# Altium PCB PCB5.PcbDoc
Units mm, origin at the board's own origin, x right, y up, seen from the top; angles counter-clockwise.
Board outline 35 x 45 mm, 2 copper layers (Top Layer, Bottom Layer); 15 components, 20 nets, 70 pads, 34 vias.
Unrouted connection lines stored in the file: 2.
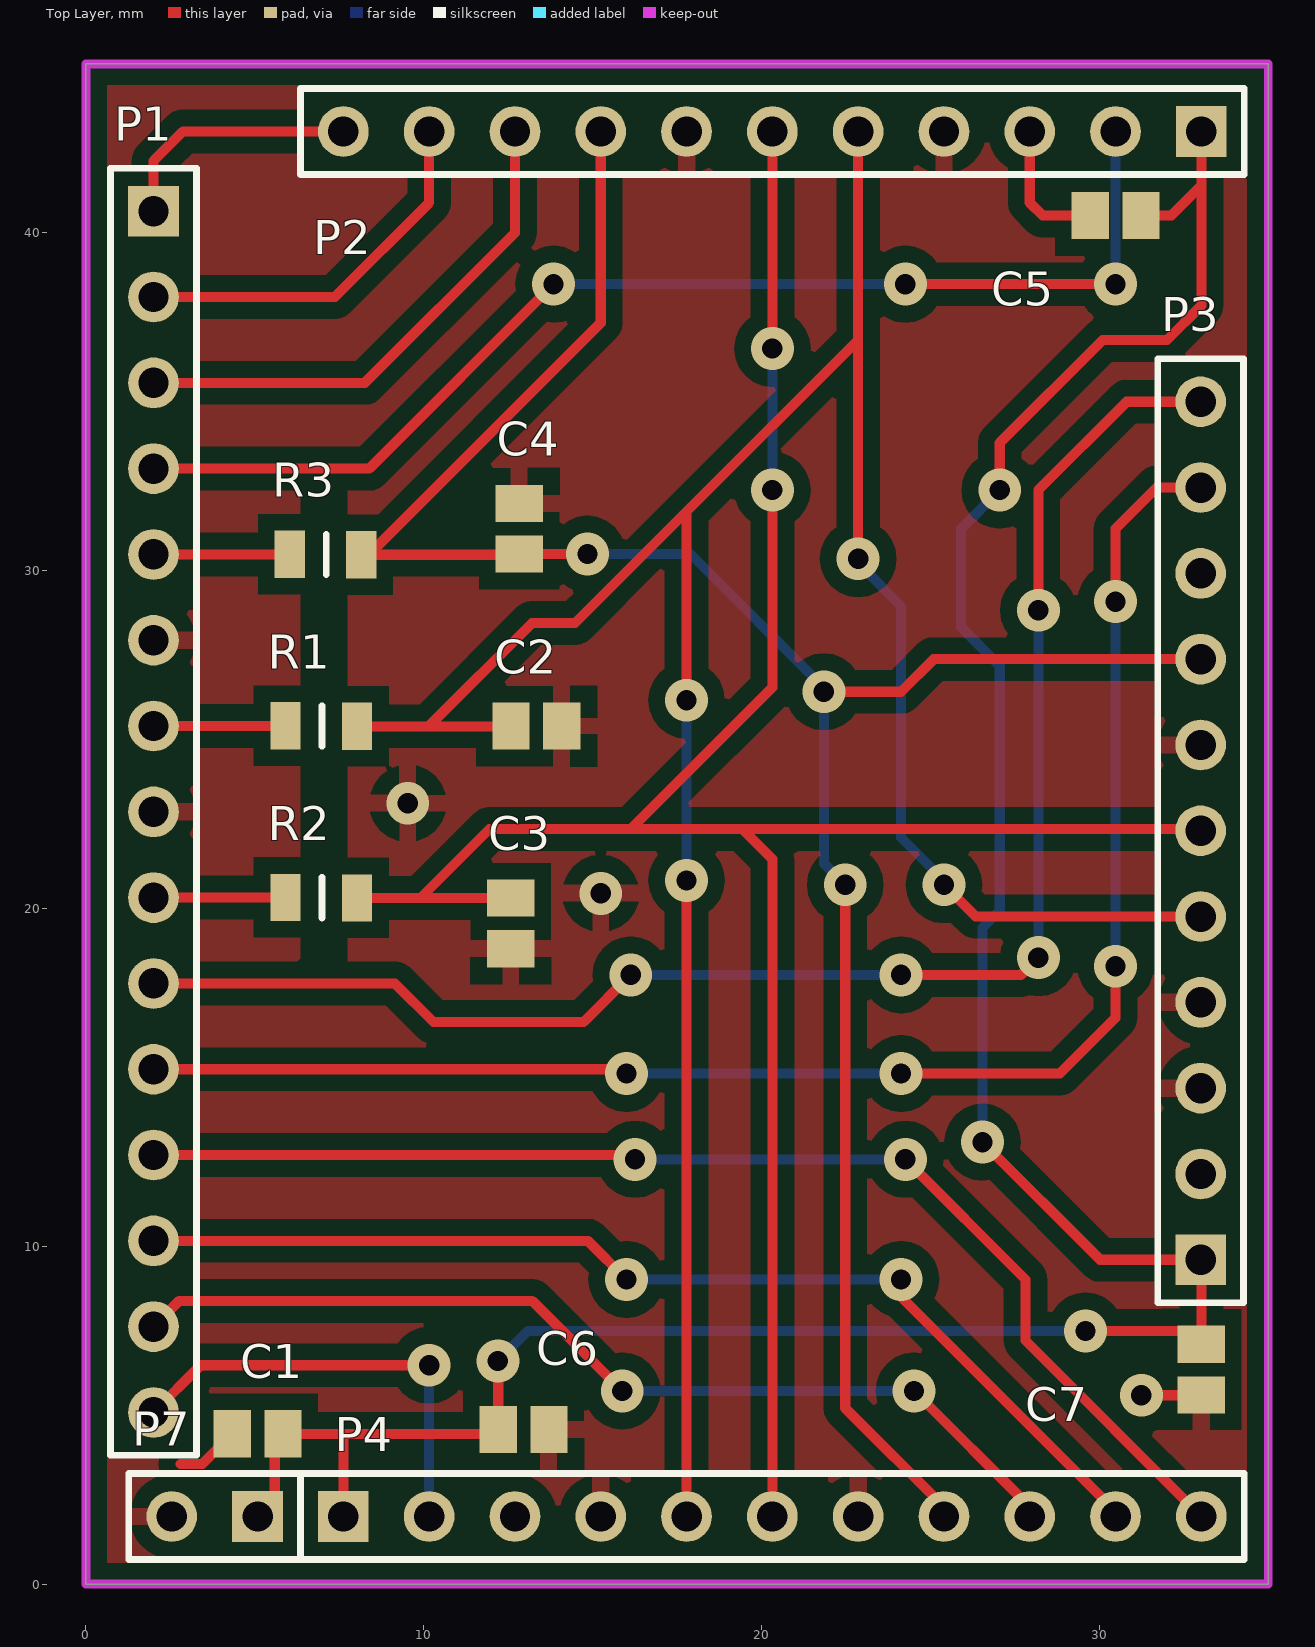
[diagram p0: Top Layer view]
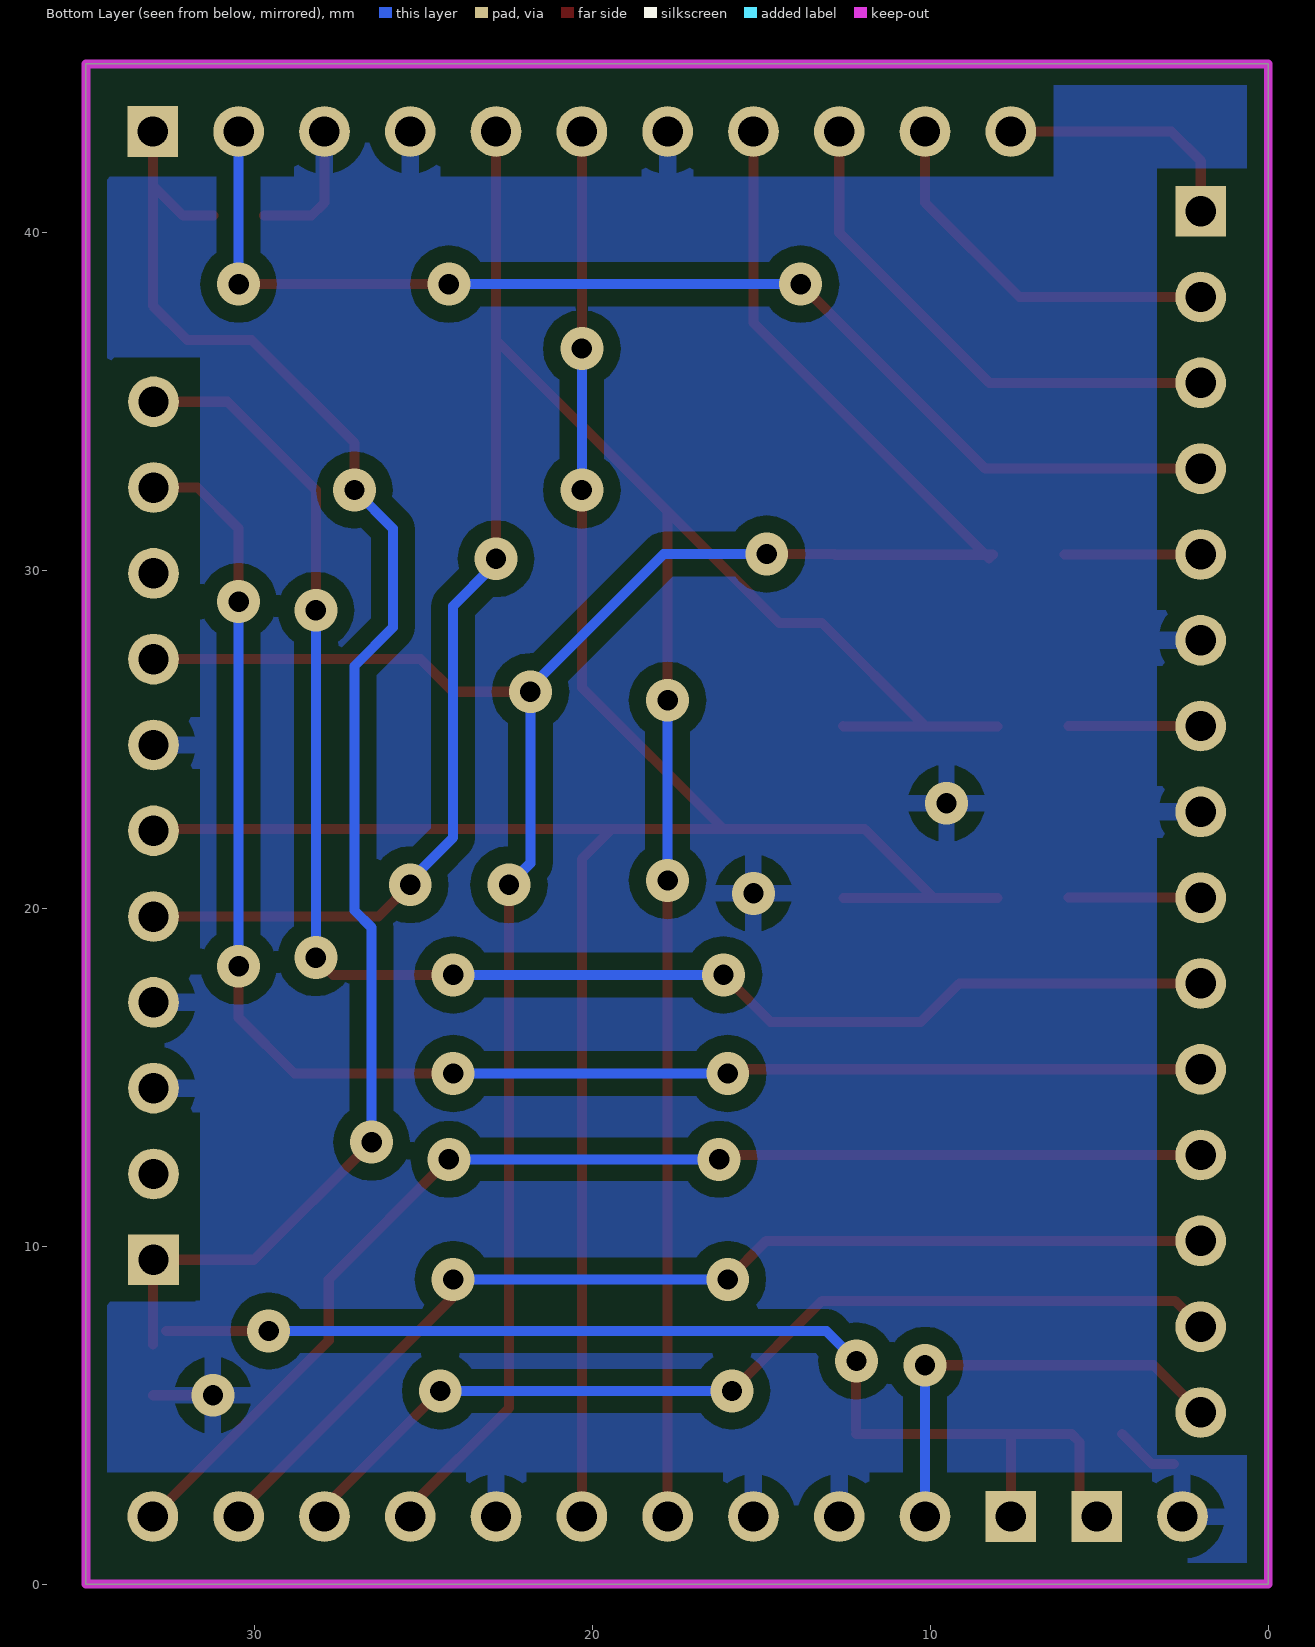
[diagram p1: Bottom Layer view, seen from below]

## Layer stack, top to bottom
Top Solder: solder mask 0.0102, Solder Resist, Dk 3.5
Top Layer: signal copper 0.0356
Dielectric 1: dielectric 0.32, FR-4, Dk 4.8
Bottom Layer: signal copper 0.0356
Bottom Solder: solder mask 0.0102, Solder Resist, Dk 3.5

## Board outline
0,0 0,45 35,45 35,0

## Design rules (kind name [scope] priority, off if disabled: settings)
AssemblyTestPointUsage [All] p1 off:
AssemblyTestpoint [All] p1 off: testpointundercomponent=TRUE minsize=1.016 maxsize=2.54 preferedsize=1.524 minholesize=0 maxholesize=1.016 preferedholesize=0.813 testpointgrid=0.025 usegrid=TRUE gridtolerance=0 allowsidetop=TRUE allowsidebottom=TRUE
Clearance [All] p1: gap=0.3
ComponentClearance [All] p1 off: gap=0.254 collisioncheckmode=3 verticalgap=0.254 showdistances=FALSE
DiffPairsRouting [All] p1 off: maxlimit=0.254 minlimit=0.254 mostfreqgap=0.254 toplayer_minwidth=0.381 toplayer_maxwidth=0.381 toplayer_prefwidth=0.381 bottomlayer_minwidth=0.381 bottomlayer_maxwidth=0.381 bottomlayer_prefwidth=0.381 maxuncoupledlength=12.7
FabricationTestPointUsage [All] p1 off: valid=0 allowmultiple=FALSE
FabricationTestpoint [All] p1 off: side=3 testpointundercomponent=TRUE minsize=1.016 maxsize=2.54 preferedsize=1.524 minholesize=0 maxholesize=1.016 preferedholesize=0.813 testpointgrid=0.025 allowsidetop=TRUE allowsidebottom=TRUE usegrid=TRUE gridtolerance=0
FanoutControl Fanout_BGA [IsBGA] p1 off: bgadir=Out bgaviamode=Centered fanoutstyle=Auto fanoutdirection=Alternating viagrid=0.025 // Fanout_BGA (Default Rule)
FanoutControl Fanout_LCC [IsLCC] p2 off: bgadir=Out bgaviamode=Centered fanoutstyle=Auto fanoutdirection=Alternating viagrid=0.025 // Fanout_LCC (Default Rule)
FanoutControl Fanout_SOIC [IsSOIC] p3 off: bgadir=Out bgaviamode=Centered fanoutstyle=Auto fanoutdirection=Alternating viagrid=0.025 // Fanout_SOIC (Default Rule)
FanoutControl Fanout_Small [(CompPinCount < 5)] p4 off: bgadir=Out bgaviamode=Centered fanoutstyle=Auto fanoutdirection=OutThenIn viagrid=0.025 // Fanout_Small (Default Rule)
FanoutControl Fanout_Default [All] p5 off: bgadir=Out bgaviamode=Centered fanoutstyle=Auto fanoutdirection=Alternating viagrid=0.025 // Fanout_Default (Default Rule)
Height [All] p1 off: minheight=0 maxheight=25.4 prefheight=12.7
HoleSize [All] p1 off: absolutevalues=TRUE maxlimit=2.54 minlimit=0.025 maxpercent=80.000 minpercent=20.000
HoleToHoleClearance [All] p1 off: gap=0.254 allowstackedmicrovias=TRUE
LayerPairs [All] p1 off: enforce=TRUE
MinimumSolderMaskSliver [All] p1 off: minsoldermaskwidth=0.254
NetAntennae [All] p1 off: netantennaetolerance=0
PlaneConnect [All] p1: planeconnectstyle=Relief reliefexpansion=0.5 reliefentries=4 reliefconductorwidth=0.5 reliefairgap=0.5
PolygonConnect [All] p1: connectstyle=Relief reliefconductorwidth=0.5 reliefentries=4 polygonreliefangle="90 Angle" airgapwidth=0.5
RoutingCorners [All] p1 off: cornerstyle=45-Degree minsetback=2.54 maxsetback=2.54
RoutingLayers [All] p1 off: top layer_v5=TRUE bottom layer_v5=TRUE
RoutingPriority [All] p1 off: routingpriority=0
RoutingTopology [All] p1 off: topology=Shortest
RoutingVias [All] p1 off: holewidth=0.6 width=1.5 viastyle="Through Hole" minholewidth=0.6 minwidth=1.27 maxholewidth=0.9 maxwidth=1.6
SilkToBoardRegionClearance [All] p1 off:
SilkToSilkClearance [All] p1 off: silktosilkclearance=0.1
SilkToSolderMaskClearance [IsPad] p1 off: minsilkscreentomaskgap=0.1 clearancetoexposedcopper=TRUE
SolderMaskExpansion [All] p1: expansion=0.102
Width [All] p1 off: maxlimit=0.5 minlimit=0.3 preferedwidth=0.3
4 further rules are at their usual default settings.

## Components (designator, comment, footprint, x,y, rotation, side; value= is the part's Value field where it differs from the comment)
C1 "Cap" C0805 5.08,4.445 r0 top
C2 "Cap" C0805 13.335,25.4 r180 top
C3 "Cap" C0805 12.573,19.558 r270 top
C4 "Cap" C0805 12.827,31.242 r90 top
C5 "Cap" C0805 30.48,40.513 r0 top
C6 "Cap" C0805 12.954,4.572 r180 top
C7 "Cap" C0805 33.02,6.35 r90 top
P1 "Header 15" HDR1X15 2,40.64 r270 top locked
P2 "Header 11" HDR1X11 33.02,43 r180 top locked
P3 "Header 11" HDR1X11 33,9.6 r90 top
P4 "Header 11" HDR1X11 7.62,2 r0 top locked
P7 "Header 2" HDR1X2 5.08,2 r180 top locked
R1 "Res2" 6-0805_N 6.985,25.4 r180 top
R2 "Res2" 6-0805_N 6.985,20.32 r180 top
R3 "Res2" 6-0805_N 7.112,30.48 r180 top

## Footprints (in the part's own frame and the unit in brackets; to place one, negate y for a bottom-side part, rotate by r counter-clockwise, add the part's x,y. Pads: shape width x height; smd on the part's side, far side on the other; paste and mask are expansions set on the pad)
6-0805_N [mm] "Chip Resistor, Body 2.0x1.2mm, IPC Medium Density"
  rect 0.9x1.4 smd: 1(-1.039,0.009) 2(1.078,-0.007)
  silkscreen extent 0,-0.6 0,0.6, body extent -1.07,-0.7 1.07,0.7, height 0.7
C0805 [mm]
  rect 1.1x1.4 smd: 1(-0.75,0) 2(0.75,0)
  body extent -1.1,-0.72 1.1,0.72, height 1.4
HDR1X2 [mm] "Connector; Header; 2 Position"
  rect 1.5x1.5 hole 0.9: 1(0,0)
  round 1.5 hole 0.9: 2(2.54,0)
  silkscreen extent -1.27,-1.27 3.81,1.27
HDR1X11 [mm] "Connector; Header; 11 Position"
  rect 1.5x1.5 hole 0.9: 1(0,0)
  round 1.5 hole 0.9: 2(2.54,0) 3(5.08,0) 4(7.62,0) 5(10.16,0) 6(12.7,0) 7(15.24,0) 8(17.78,0) 9(20.32,0) 10(22.86,0) 11(25.4,0)
  silkscreen extent -1.27,-1.27 26.67,1.27
HDR1X15 [mm] "Connector; Header; 15 Position"
  rect 1.5x1.5 hole 0.9: 1(0,0)
  round 1.5 hole 0.9: 2(2.54,0) 3(5.08,0) 4(7.62,0) 5(10.16,0) 6(12.7,0) 7(15.24,0) 8(17.78,0) 9(20.32,0) 10(22.86,0) 11(25.4,0) 12(27.94,0) 13(30.48,0) 14(33.02,0) 15(35.56,0)
  silkscreen extent -1.27,-1.27 36.83,1.27

## Part data
C1 C2 C3 C4 C5 C6 C7: "Capacitor"
P1: "Header, 15-Pin"
P2 P3 P4: "Header, 11-Pin"
P7: "Header, 2-Pin"
R1 R2 R3: "Resistor"

## Via types
v1: diameter 1.27, hole 0.6, Top Layer to Bottom Layer, 34 vias

## Nets (pads, with @x,y where several pads share a name; then routed paths per layer and width w, separated by ;. In a path a pad name is that pad's centre, name@x,y a point inside that pad or via, vN(x,y) a via of type N, cw(c..) or ccw(c..) an arc to the next point about the centre after c; other vN are vias at no path point)
3.3V: C1.2 C5.2 C6.2 C7.2 P2.1 P3.1 P4.1 P7.1 | length 81.6
  Top Layer w0.3: P7.1 5.588,2.508 5.588,4.203 C1.2 7.62,4.445 ; P4.1 7.62,4.445 ; v1(12.192,6.604) 12.204,6.592 C6.2 ; C6.2@12.204,4.445 7.62,4.445 ; v1(26.543,13.081) 30.024,9.6 P3.1 ; v1(27.051,32.385) 27.051,33.782 30.099,36.83 32.004,36.83 33.02,37.846 33.02,41.402 ; v1(29.591,7.493) C7.2@32.627,7.493 ; C5.2 32.131,40.513 33.02,41.402 ; C7.2 P3.1@33.02,9.58 ; P2.1 33.02,41.402
  Bottom Layer w0.3: v1(12.192,6.604) 13.081,7.493 v1(29.591,7.493) ; v1(26.543,13.081) 26.543,19.431 27.051,19.939 27.051,27.178 25.908,28.321 25.908,31.242 v1(27.051,32.385)
GND: C1.1 C2.1 C3.2 C4.2 C5.1 C6.1 C7.1 P1.6 P1.8 P2.3 P2.4 P2.7 P3.3 P3.4 P3.7 P4.3 P4.4 P4.7 P7.2 | length 7.7
  Top Layer w0.3: 2.794,3.556 3.441,3.556 C1.1 ; P2.3 27.94,40.894 28.321,40.513 C5.1 ; v1(31.242,5.588) C7.1@33.008,5.588
  other v1: 15.24,20.447 9.525,23.114
MISO: C2.2 P2.5 P3.5 P4.5 R1.1 | length 83
  Top Layer w0.3: R1.1 10.033,25.391 ; C2.2 12.576,25.391 10.033,25.391 ; P4.5 v1(17.78,20.828) ; v1(17.78,26.162) 17.78,31.75 ; v1@22.86,30.226 22.86,36.83 ; P2.5 22.86,36.83 ; v1@25.4,20.828 v1(25.4,20.701) 26.341,19.76 P3.5 ; 10.033,25.391 10.151,25.391 13.208,28.448 14.478,28.448 17.78,31.75 ; 17.78,31.75 22.86,36.83
  Bottom Layer w0.3: v1(17.78,20.828) v1(17.78,26.162) ; v1@22.987,30.099 24.13,28.956 24.13,22.098 v1@25.4,20.828
  other v1: 22.86,30.353
MOSI: C3.1 P2.6 P3.6 P4.6 R2.1 | length 71.9
  Top Layer w0.3: R2.1 9.906,20.311 ; C3.1 12.57,20.311 9.906,20.311 ; 19.431,22.352 20.32,21.463 P4.6 ; v1(20.32,36.576) 20.447,36.576 20.32,36.703 P2.6 ; v1@20.447,32.385 20.32,32.258 20.32,26.543 16.129,22.352 ; P3.6 32.948,22.352 16.129,22.352 ; 9.906,20.311 11.947,22.352 16.129,22.352
  Bottom Layer w0.3: v1(20.32,36.576) 20.32,32.512 v1@20.447,32.385
  other v1: 20.32,32.385
NetP1_5: P1.5 R3.2 | length 4
  Top Layer w0.3: P1.5 R3.2@6.027,30.48
NetP1_7: P1.7 R1.2 | length 3.9
  Top Layer w0.3: P1.7 R1.2@5.907,25.4
NetP1_9: P1.9 R2.2 | length 3.9
  Top Layer w0.3: P1.9 5.9,20.32 R2.2
RST1: P1.4 P2.2 | length 35.3
  Top Layer w0.3: P1.4 8.382,33.02 v1(13.843,38.481) ; v1(24.257,38.481) v1(30.48,38.481)
  Bottom Layer w0.3: v1(13.843,38.481) v1(24.257,38.481) ; v1(30.48,38.481) P2.2
RST2: P1.2 P2.10 | length 11.4
  Top Layer w0.3: P1.2 7.366,38.1 10.16,40.894 P2.10
RST3: P3.2
RST4: P1.11 P3.10 | length 46.7
  Top Layer w0.3: P1.11 15.875,15.24 v1(16.002,15.113) ; v1(24.13,15.113) 28.829,15.113 30.48,16.764 v1(30.48,18.288) ; v1(30.48,29.083) 30.48,31.242 31.698,32.46 P3.10
  Bottom Layer w0.3: v1(16.002,15.113) v1(24.13,15.113) ; v1(30.48,18.288) v1(30.48,29.083)
RST5: P1.15 P4.2 | length 13.2
  Top Layer w0.3: P1.15 3.397,6.477 v1(10.16,6.477)
  Bottom Layer w0.3: P4.2 v1(10.16,6.477)
RST6: P1.13 P4.10 | length 31.9
  Top Layer w0.3: P1.13@2.127,10.16 14.859,10.16 v1(16.002,9.017) ; v1(24.13,9.017) 24.13,8.509 30.48,2.159 P4.10
  Bottom Layer w0.3: v1@16.256,9.017 v1(24.13,9.017)
SCK: C4.1 P2.8 P3.8 P4.8 R3.1 | length 68.4
  Top Layer w0.3: R3.1 R3.1@8.373,30.471 ; R3.1@8.262,30.36 R3.1@8.373,30.471 ; v1(14.847,30.492) C4.1 12.806,30.471 R3.1@8.373,30.471 ; P2.8 15.24,37.338 R3.1@8.373,30.471 ; v1(21.844,26.416) 24.13,26.416 25.094,27.38 P3.8 ; v1(22.479,20.701) 22.479,5.207 25.4,2.286 P4.8
  Bottom Layer w0.3: v1(14.847,30.492) 17.895,30.492 21.844,26.543 21.844,21.336 v1(22.479,20.701)
SS1: P1.3 P2.9 | length 15.5
  Top Layer w0.3: P1.3 8.255,35.56 12.7,40.005 P2.9
SS2: P1.1 P2.11 | length 7.5
  Top Layer w0.3: P1.1 2,42.132 2.868,43 P2.11
SS3: P3.9
SS4: P1.10 P3.11 | length 47.2
  Top Layer w0.3: P1.10 9.144,17.78 10.287,16.637 14.732,16.637 v1(16.129,18.034) ; v1(24.13,18.034) 27.686,18.034 v1(28.194,18.542) ; v1(28.194,28.829) 28.194,32.385 30.809,35 P3.11
  Bottom Layer w0.3: v1(16.129,18.034) v1(24.13,18.034) ; v1(28.194,18.542) v1(28.194,28.829)
SS5: P1.14 P4.9 | length 28.9
  Top Layer w0.3: P1.14 2.762,8.382 13.208,8.382 v1(15.875,5.715) ; v1(24.511,5.715) 27.94,2.286 P4.9
  Bottom Layer w0.3: v1@16.002,5.715 v1(24.511,5.715)
SS6: P1.12 P4.11 | length 36.5
  Top Layer w0.3: P1.12 16.129,12.7 v1(16.256,12.573) ; v1(24.257,12.573) 27.813,9.017 27.813,7.207 P4.11
  Bottom Layer w0.3: v1(16.256,12.573) v1(24.257,12.573)

## Polygon pours and split planes (outlines as drawn)
GND on Bottom Layer "Bottom Layer-No Net" (solid, pour order 4): 0,45 35,45 35,0 0,0
GND on Top Layer "Bottom Layer-No Net" (solid, pour order 6): 0,45 35,45 35,0 0,0

## Keep-outs
Keep-Out Layer:
  the board outline again, w0.254

## Other copper
Top Layer:
  pour cut-out: 6.35,32.385 7.747,32.385 7.747,18.542 6.35,18.542
Multi-Layer:
  pour cut-out: 0.635,22.098 3.302,22.098 3.302,3.81 0.635,3.81
  pour cut-out: 0.635,27.178 3.302,27.178 3.302,23.622 0.635,23.622
  pour cut-out: 0.635,41.91 3.302,41.91 3.302,28.829 0.635,28.829
  pour cut-out: 31.623,13.97 34.29,13.97 34.29,8.382 31.623,8.382
  pour cut-out: 31.623,24.13 34.29,24.13 34.29,18.034 31.623,18.034
  pour cut-out: 31.623,36.322 34.163,36.322 34.29,36.195 34.29,25.654 31.623,25.654
  pour cut-out: 23.749,3.302 23.749,0.635 34.29,0.635 34.29,3.302
  pour cut-out: 16.129,3.302 16.129,0.635 21.971,0.635 21.971,3.302
  pour cut-out: 3.429,3.302 3.429,0.635 11.811,0.635 11.811,3.302
  pour cut-out: 28.829,44.323 28.829,41.656 34.29,41.656 34.29,44.323
  pour cut-out: 18.542,44.323 18.542,41.656 24.511,41.656 24.511,44.323
  pour cut-out: 6.35,44.323 6.35,41.656 17.018,41.656 17.018,44.323